# Altium PCB esc.PcbDoc
Units mil, origin at the board's own origin, x right, y up, seen from the top; angles counter-clockwise.
Board outline 1750 x 2825 mil, 4 copper layers (Top Layer, Ground Plane, Power Plane, Bottom Layer), stack 60.4 mil thick; 64 components, 36 nets, 185 pads, 90 vias.
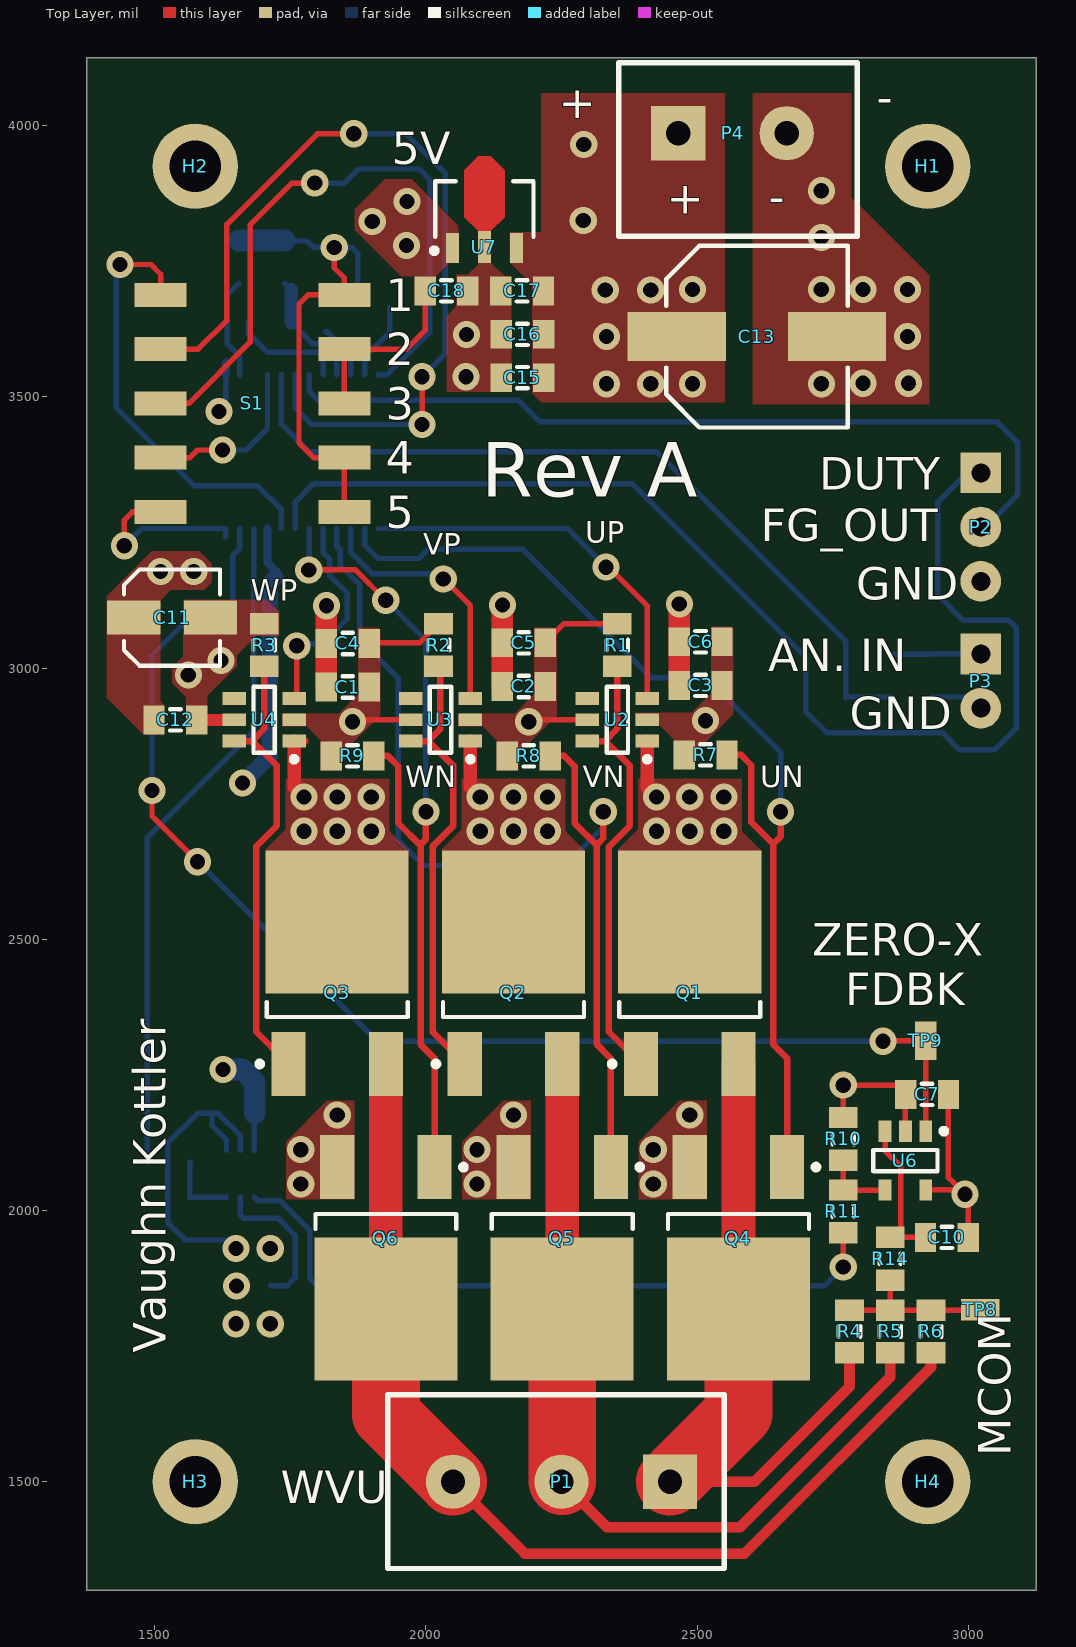
[diagram p0: Top Layer view]
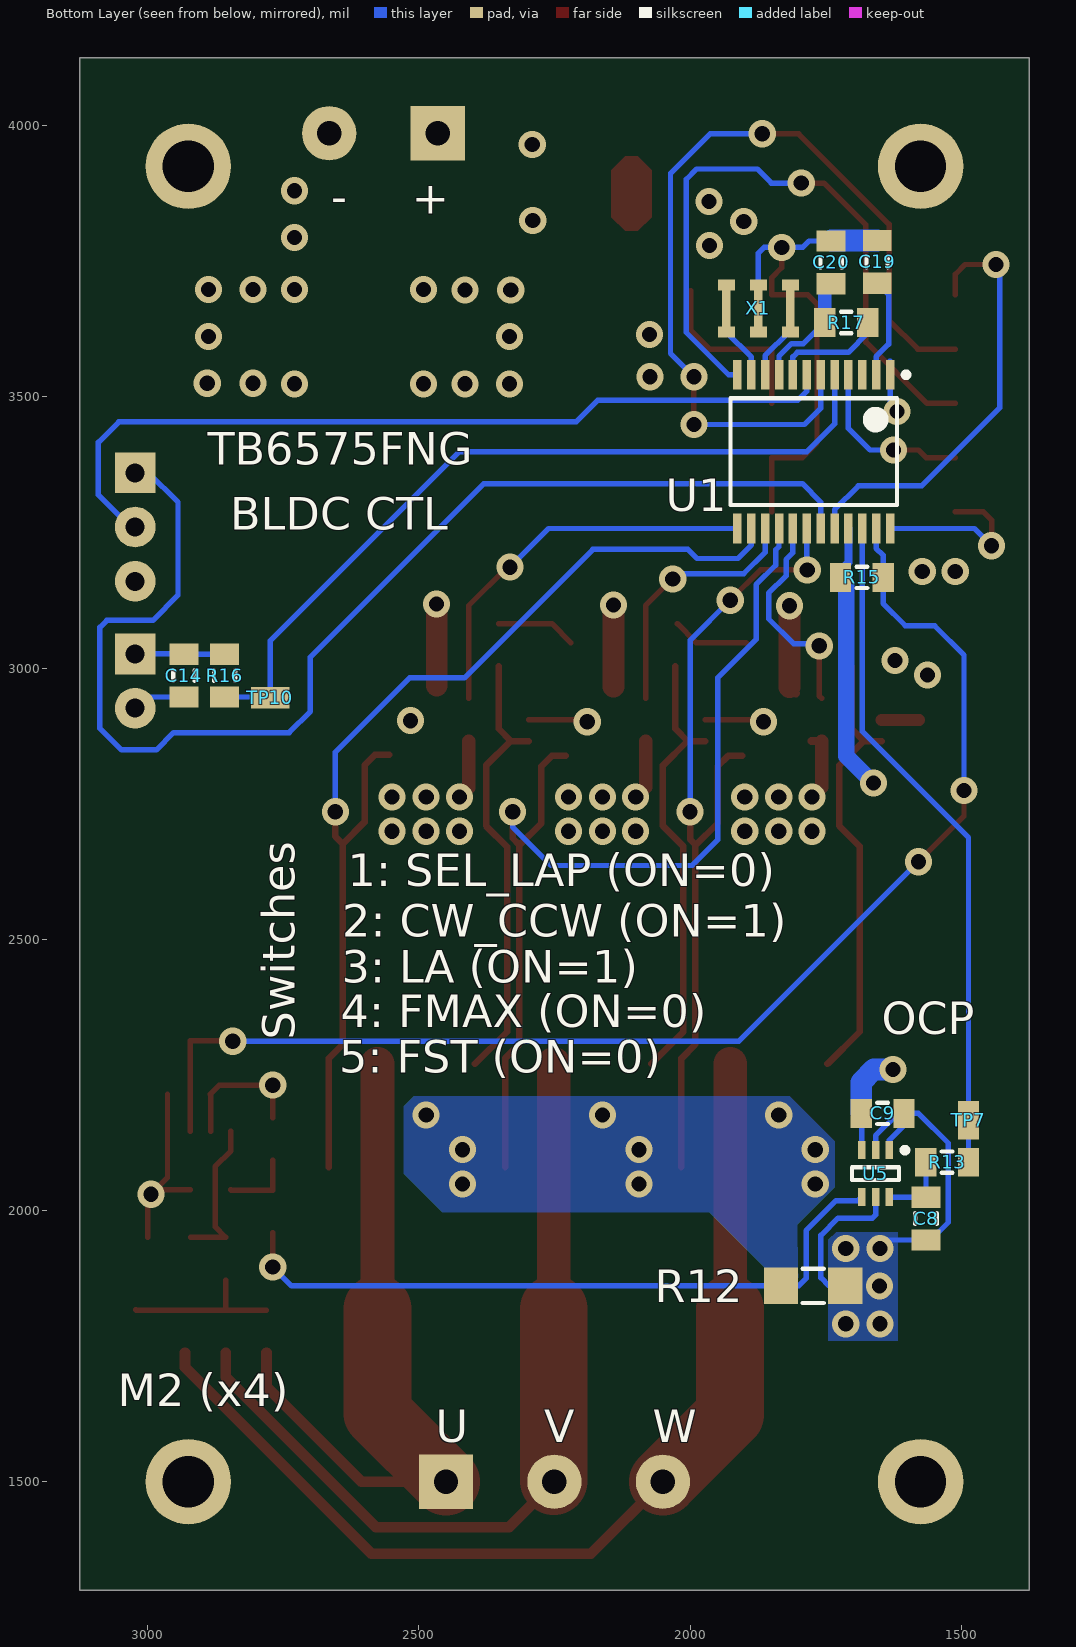
[diagram p1: Bottom Layer view, seen from below]
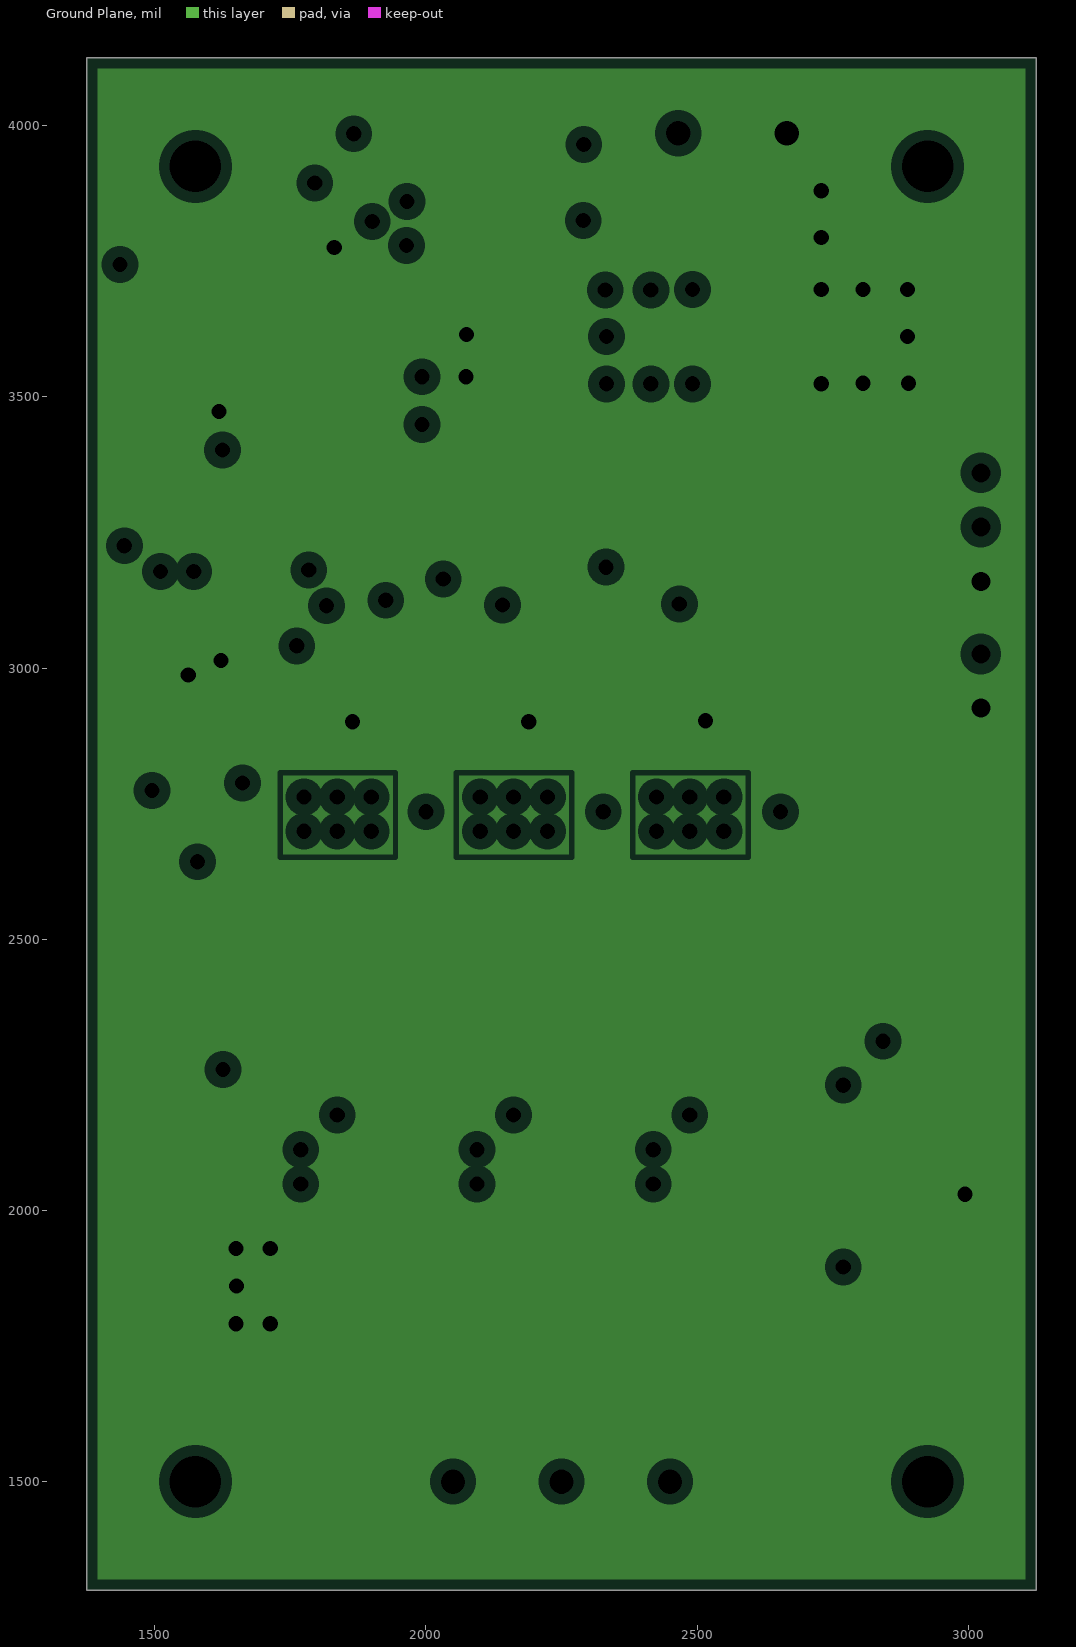
[diagram p2: Ground Plane, clearances drawn from the general rule]
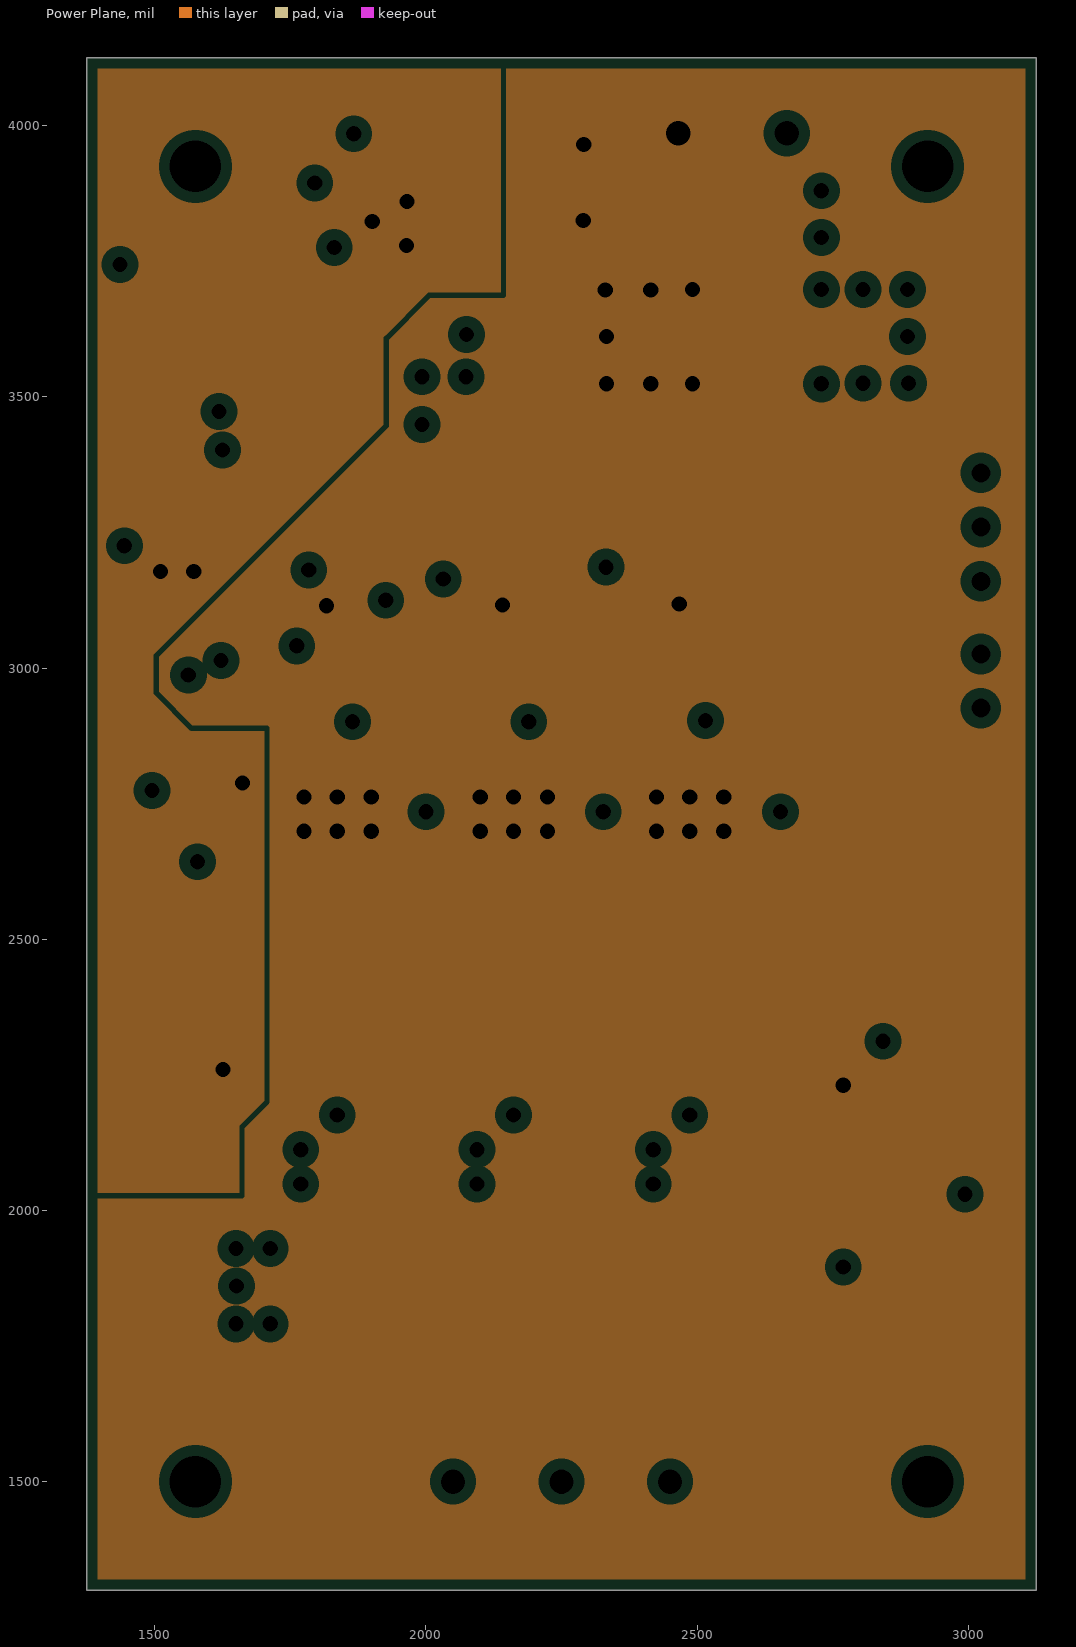
[diagram p3: Power Plane, clearances drawn from the general rule]

## Layer stack, top to bottom
Top Solder: solder mask 0.4, Solder Resist, Dk 3.5
Top Layer: signal copper 1.4
Dielectric 1: prepreg 7.5, Dk 4.3
Ground Plane: plane copper 2.8, net GND
Dielectric 3: core 37, FR-4, Dk 4.3
Power Plane: plane copper 2.8, net VBATT+
Dielectric 4: prepreg 7.5, Dk 4.3
Bottom Layer: signal copper 1.4
Bottom Solder: solder mask 0.4, Solder Resist, Dk 3.5

## Board outline
1375,1300 1375,4125 3125,4125 3125,1300

## Design rules (kind name [scope] priority, off if disabled: settings)
Clearance [All] p1: gap=6 ignorepadtopadclearanceinfootprint=FALSE except(0: Arc-Hole Track-Hole SMDPad-Hole THPad-Hole Via-Hole Fill-Hole Poly-Hole Region-Hole Text-Hole)
MinimumSolderMaskSliver [All] p1: minsoldermaskwidth=1
PlaneClearance [All] p1: clearance=20
PlaneConnect [All] p1: planeconnectstyle=Direct reliefexpansion=20 reliefentries=4 reliefconductorwidth=10 reliefairgap=10
PolygonConnect PolygonConnect_16 [All vs IsNamedPolygon('Top Layer-5V')] p1: connectstyle=Direct reliefconductorwidth=10 reliefentries=4 polygonreliefangle="90 Angle" airgapwidth=10
PolygonConnect PolygonConnect_15 [All vs IsNamedPolygon('5V_L01_P032')] p2: connectstyle=Direct reliefconductorwidth=10 reliefentries=4 polygonreliefangle="90 Angle" airgapwidth=10
PolygonConnect PolygonConnect_14 [All vs IsNamedPolygon('5V_L01_P032')] p3: connectstyle=Direct reliefconductorwidth=10 reliefentries=4 polygonreliefangle="90 Angle" airgapwidth=10
PolygonConnect PolygonConnect_13 [All vs IsNamedPolygon('5V-TOP')] p4: connectstyle=Direct reliefconductorwidth=10 reliefentries=4 polygonreliefangle="90 Angle" airgapwidth=10
PolygonConnect PolygonConnect_12 [All vs IsNamedPolygon('GND_L01_P028')] p5: connectstyle=Direct reliefconductorwidth=10 reliefentries=4 polygonreliefangle="90 Angle" airgapwidth=10
PolygonConnect PolygonConnect_11 [All vs IsNamedPolygon('GND_L01_P026')] p6: connectstyle=Direct reliefconductorwidth=10 reliefentries=4 polygonreliefangle="90 Angle" airgapwidth=10
PolygonConnect PolygonConnect_10 [All vs IsNamedPolygon('GND_L01_P026')] p7: connectstyle=Direct reliefconductorwidth=10 reliefentries=4 polygonreliefangle="90 Angle" airgapwidth=10
PolygonConnect PolygonConnect_9 [All vs IsNamedPolygon('GND_L01_P024')] p8: connectstyle=Direct reliefconductorwidth=10 reliefentries=4 polygonreliefangle="90 Angle" airgapwidth=10
PolygonConnect PolygonConnect_8 [All vs IsNamedPolygon('GND_L01_P022')] p9: connectstyle=Direct reliefconductorwidth=10 reliefentries=4 polygonreliefangle="90 Angle" airgapwidth=10
PolygonConnect PolygonConnect_7 [All vs IsNamedPolygon('GND_L01_P022')] p10: connectstyle=Relief reliefconductorwidth=4 reliefentries=4 polygonreliefangle="90 Angle" airgapwidth=10
PolygonConnect PolygonConnect_6 [All vs IsNamedPolygon('5V-REG-GND')] p11: connectstyle=Direct reliefconductorwidth=10 reliefentries=4 polygonreliefangle="90 Angle" airgapwidth=10
PolygonConnect PolygonConnect_5 [All vs IsNamedPolygon('GND-IN')] p12: connectstyle=Direct reliefconductorwidth=10 reliefentries=4 polygonreliefangle="90 Angle" airgapwidth=10
PolygonConnect PolygonConnect_4 [All vs IsNamedPolygon('VBATT-IN')] p13: connectstyle=Direct reliefconductorwidth=10 reliefentries=4 polygonreliefangle="90 Angle" airgapwidth=10
PolygonConnect PolygonConnect_3 [All vs IsNamedPolygon('RET-GND')] p14: connectstyle=Direct reliefconductorwidth=10 reliefentries=4 polygonreliefangle="90 Angle" airgapwidth=10
PolygonConnect PolygonConnect_2 [All vs InNet('VBATT+')] p15: connectstyle=Direct reliefconductorwidth=10 reliefentries=4 polygonreliefangle="90 Angle" airgapwidth=10
PolygonConnect PolygonConnect_1 [All vs InNet('FET_RET')] p16: connectstyle=Direct reliefconductorwidth=10 reliefentries=4 polygonreliefangle="90 Angle" airgapwidth=10
PolygonConnect [All] p17: connectstyle=Relief reliefconductorwidth=10 reliefentries=4 polygonreliefangle="90 Angle" airgapwidth=10
RoutingVias [All] p1: holewidth=28 width=50 viastyle="Through Hole" minholewidth=28 minwidth=50 maxholewidth=28 maxwidth=50
SilkToSolderMaskClearance [IsPad] p1 off: minsilkscreentomaskgap=10 clearancetoexposedcopper=TRUE
SolderMaskExpansion [All] p1: expansion=4
Width [All] p1: maxlimit=200 minlimit=10 preferedwidth=10
26 further rules are at their usual default settings.

## Classes and differential pairs
polygon class POWER: FET-RET-TOP-1 FET-RET-TOP-3
component class "Output Stage": C1 C2 C3 C4 C5 C6 C7 C8 C9 C10 Q1 Q2 Q3 Q4 Q5 Q6 R1 R2 R3 R4 R5 R6 R7 R8 R9 R10 R11 R12 R13 R14 R15 TP7 TP8 TP9 U2 U3 U4 U5 U6
component class esc: C11 C12 H1 H2 H3 H4 P1 P2 S1 U1 X1
component class "ESC Control Inputs": C13 C14 C15 C16 C17 C18 C19 C20 P3 P4 R16 R17 TP10 U7

## Components (designator, comment, footprint, x,y, rotation, side; value= is the part's Value field where it differs from the comment)
C1 "1 uF" CAP-CER-0805-TALL 1855.93,2965.02 r180 top
C2 "1 uF" CAP-CER-0805-TALL 2180.37,2966 r180 top
C3 "1 uF" CAP-CER-0805-TALL 2506.61,2968 r180 top
C4 "0.1 uF" CAP-CER-0805-SHORT 1855.93,3045.37 r180 top
C5 "0.1 uF" CAP-CER-0805-SHORT 2180.37,3046.56 r180 top
C6 "0.1 uF" CAP-CER-0805-SHORT 2506.61,3048.56 r180 top
C7 "0.1 uF" CAP-CER-0805-SHORT 2924,2214 r180 top
C8 "10 nF" CAP-CER-0805-SHORT 1565,1985 r90 bottom
C9 "0.1 uF" CAP-CER-0805-SHORT 1645,2179 r0 bottom
C10 "22 pF" CAP-CER-0805-SHORT 2960.37,1950.37 r180 top
C11 "22uF" CAP-CAN-5.3x5.3 1532,3093 r0 top
C12 "0.1 uF" CAP-CER-0805-SHORT 1538,2904.5 r180 top
C13 "220 uF" CAP-CAN-8.3x8.3 2610.32,3611 r0 top
C14 "10 nF" CAP-CER-0805-SHORT 2933,2986 r90 bottom
C15 "0.22 uF" CAP-CER-0805-SHORT 2178,3535.32 r0 top
C16 "0.1 uF" CAP-CER-0805-SHORT 2178,3615.32 r0 top
C17 "10 nF" CAP-CER-0805-SHORT 2177.37,3695.32 r0 top
C18 "0.1 uF" CAP-CER-0805-SHORT 2038,3695.32 r180 top
C19 "0.47 uF" CAP-CER-0805-TALL 1655,3748.81 r270 bottom
C20 "1 uF" CAP-CER-0805-TALL 1740,3748 r270 bottom
H1 "Mount Hole" "m2 Mount Hole" 2925,3925 r0 top
H2 "Mount Hole" "m2 Mount Hole" 1575,3925 r0 top
H3 "Mount Hole" "m2 Mount Hole" 1575,1500 r0 top
H4 "Mount Hole" "m2 Mount Hole" 2925,1500 r0 top
P1 "3Pos Screw Terminal" "3POS SCREW TERMINAL" 2450,1500 r270 top
P2 "3Pos Pin Header" "3Pos Pin Header F RA R" 3023,3360 r0 top
P3 "2Pos Pin Header" "2Pos Pin Header F RA R" 3023,3026 r0 top
P4 "2Pos Screw Terminal" "2POS SCREW TERMINAL" 2465.32,3986 r90 top
Q1 "P-Channel" DPAK 2486.47,2400.08 r90 top
Q2 "P-Channel" DPAK 2161.47,2400.08 r90 top
Q3 "P-Channel" DPAK 1836.47,2400.08 r90 top
Q4 "N-Channel" DPAK 2576.24,1950.08 r270 top
Q5 "N-Channel" DPAK 2251.24,1950.08 r270 top
Q6 "N-Channel" DPAK 1926.24,1950.08 r270 top
R1 "1K" RES-0805 2352.88,3042.37 r270 top
R2 "1K" RES-0805 2023.48,3042.37 r270 top
R3 "1K" RES-0805 1701.88,3042.37 r270 top
R4 "10K" RES-0805 2781,1777 r270 top
R5 "10K" RES-0805 2856,1777 r270 top
R6 "10K" RES-0805 2931,1777 r270 top
R7 "1K" RES-0805 2515.63,2840 r0 top
R8 "1K" RES-0805 2189.63,2838 r0 top
R9 "1K" RES-0805 1864.63,2838 r0 top
R10 "100K" RES-0805 2769.4,2131.93 r270 top
R11 "100K" RES-0805 2769.4,1998.24 r270 top
R12 "1m" RES-1206 1773,1861 r180 bottom
R13 "33" RES-0805 1526,2089 r180 bottom
R14 "1K" RES-0805 2856,1911 r270 top
R15 "10K" RES-0805 1683.37,3167.21 r0 bottom
R16 "33" RES-0805 2858,2986 r270 bottom
R17 "220K" RES-0805 1712,3637 r180 bottom
S1 "5Pos DIP Switch" DIP-SW-5 1849.58,3288 r180 top
TP7 "Test Point" "0603 Test Point" 1486.63,2166 r90 bottom
TP8 "Test Point" "0603 Test Point" 3022,1817 r180 top
TP9 "Test Point" "0603 Test Point" 2921.4,2313 r270 top
TP10 "Test Point" "0603 Test Point" 2774,2945 r180 bottom
U1 "TB6575FNG" SSOP24-0.65 1772,3399 r270 bottom
U2 "MOSFET Driver" SOT-23-6 2352.88,2904.63 r180 top
U3 "MOSFET Driver" SOT-23-6 2026.88,2904.63 r180 top
U4 "MOSFET Driver" SOT-23-6 1701.88,2904.63 r180 top
U5 "INA199A2" SC70 1658,2068 r270 bottom
U6 "Comparator, Open-Drain" SOT-23-5 2884,2092 r270 top
U7 "Linear 5V 100mA" SOT-89 2108,3845.32 r90 top
X1 "4.19 MHz, 15 pF" CSTCR 1874,3663 r0 bottom

## Footprints (in the part's own frame and the unit in brackets; to place one, negate y for a bottom-side part, rotate by r counter-clockwise, add the part's x,y. Pads: shape width x height; smd on the part's side, far side on the other; paste and mask are expansions set on the pad)
"2Pos Pin Header F RA R" [mil] "Female, 0.1\" Pitch"
  rect 75x75 hole 35: 1(0,0)
  round 75 hole 35: 2(0,-100)
  body extent -13,-150 395,50, height 100
"2POS SCREW TERMINAL" [mil] "0.2\" Pitch"
  rect 100x100 hole 45: 1(0,0)
  round 100 hole 45: 2(0,-200)
  silkscreen extent -190,-330 130,110, body extent -179,-319 120,99, height 394
"3Pos Pin Header F RA R" [mil] "Female, 0.1\" Pitch"
  rect 75x75 hole 35: 1(0,0)
  round 75 hole 35: 2(0,-100) 3(0,-200)
  body extent -13,-250 395,50, height 100
"3POS SCREW TERMINAL" [mil] "0.2\" Pitch"
  rect 100x100 hole 45: 1(0,0)
  round 100 hole 45: 2(0,-200) 3(0,-400)
  silkscreen extent -160,-520 160,100, body extent -154,-515 155,96, height 411
"0603 Test Point" [mm]
  rect 1.8x1 smd: 1(0,0)
  body extent -0.8,-0.45 0.8,0.45, height 1.16
CAP-CAN-5.3x5.3 [mm] "Aluminum Electrolytic Capacitor, Body 4.30x4.30x5.50mm, IPC Low Density"
  rect 2.5x1.6 smd: 1(-1.8,0) 2(1.8,0)
  silkscreen extent -2.25,-2.25 2.25,2.25, body extent -2.47,-2.25 2.47,2.25, height 5.5
CAP-CAN-8.3x8.3 [mm] "Aluminum Electrolytic Capacitor, Body 8.30x8.30x10.50mm, IPC Low Density"
  rect 4.6x2.3 smd: 1(-3.75,0) 2(3.75,0)
  silkscreen extent -4.25,-4.25 4.25,4.25, body extent -4.95,-4.25 4.95,4.25, height 10.5
CAP-CER-0805-SHORT [mm] "Chip Capacitor, 2-Leads, Body 2.00x1.25mm, IPC Medium Density"
  rect 1x1.35 smd: 1(-1,0) 2(1,0)
  silkscreen extent -0.25,-0.5 0.25,0.5, body extent -1.1,-0.72 1.1,0.72, height 0.9
CAP-CER-0805-TALL [mm] "Chip Capacitor, 2-Leads, Body 2.00x1.25mm, IPC Medium Density"
  rect 1x1.35 smd: 1(-1,0) 2(1,0)
  silkscreen extent -0.25,-0.5 0.25,0.5, body extent -1.1,-0.72 1.1,0.72, height 1.1
CSTCR [mm] "Ceramic Oscillator Built-In Capacitance"
  rect 0.8x0.5 smd: 1(1.5,-1.1) 1(1.5,1.1) 2(0,1.1) 2(0,-1.1) 3(-1.5,-1.1) 3(-1.5,1.1)
  rect 0.4x2.6 smd: 1(1.5,0) 2(0,0) 3(-1.5,0)
  body extent -2.25,-1 2.25,1, height 1.15
DIP-SW-5 [mm] "5 0.1\" Pitch SMT Dip Switches"
  rect 2.44x1.13 smd: 1(0,0) 2(0,-2.54) 3(0,-5.08) 4(0,-7.62) 5(0,-10.16) 6(8.6,-10.16) 7(8.6,-7.62) 8(8.6,-5.08) 9(8.6,-2.54) 10(8.6,0)
  body extent -0.64,-12.16 9.27,2.01, height 4.28
DPAK [mm] "D-PAK, 3-Pads, Body 6.20x6.66mm (max), IPC Medium Density"
  rect 3x1.6 smd: 1(-3.3,2.28) 3(-3.3,-2.28)
  rect 6.7x6.7 smd: 2(3.35,0)
  silkscreen extent -3.42,-3.3 -0.4,3.75, body extent -3.81,-3.3 5.91,3.3, height 2.63
"m2 Mount Hole" [mm] "4mm"
  round 4 hole 2.4: H(0,0)
  body extent -1.9,-1.9 1.9,1.9, height 2
RES-0805 [mm] "Chip Resistor, 2-Leads, Body 2.00x1.25mm, IPC Medium Density"
  rect 1x1.35 smd: 1(-1,0) 2(1,0)
  silkscreen extent -0.25,-0.5 0.25,0.5, body extent -1.07,-0.7 1.07,0.7, height 0.65
RES-1206 [mm] "Chip Resistor, 2-Leads, Body 3.20x1.60mm, IPC Medium Density"
  rect 1.6x1.7 smd: 1(-1.5,0) 2(1.5,0)
  silkscreen extent -0.5,-0.8 0.5,0.8, body extent -1.72,-0.85 1.73,0.85, height 0.8
SC70 [mm] "SOT23, 6-Leads, Body 2.00x2.10mm, Pitch 0.65mm, IPC Medium Density"
  rect 0.85x0.35 smd: 1(-1.1,0.65) 2(-1.1,0) 3(-1.1,-0.65) 4(1.1,-0.65) 5(1.1,0) 6(1.1,0.65)
  silkscreen extent -1.22,-1.1 0.3,1.5, body extent -1.2,-1.08 1.2,1.07, height 1.1
SOT-23-5 [mm] "SOT23, 5-Leads, Body 2.90x2.80mm, Pitch 0.95mm, IPC Medium Density"
  rect 1x0.6 smd: 1(-1.375,0.95) 2(-1.375,0) 3(-1.375,-0.95) 4(1.375,-0.95) 5(1.375,0.95)
  silkscreen extent -1.5,-1.5 0.5,1.93, body extent -1.6,-1.5 1.6,1.5, height 1.45
SOT-23-6 [mm] "SOT23, 6-Leads, Body 2.90x2.70mm, Pitch 1.00mm, IPC Medium Density"
  rect 1.1x0.6 smd: 1(-1.4,1) 2(-1.4,0) 3(-1.4,-1) 4(1.4,-1) 5(1.4,0) 6(1.4,1)
  silkscreen extent -1.53,-1.55 0.5,1.97, body extent -1.7,-1.55 1.7,1.55, height 1.45
SOT-89 [mm] "SOT89, 3-Leads, Body 4.50x2.45mm, Pitch 1.50mm, Lead Span 4.1mm, IPC Medium Density"
  rect 1.4x0.6 smd: 1(-1.8,1.5) 3(-1.8,-1.5)
  rect 1.5x0.6 smd: 2(-1.75,0)
  Top Layer region: -1,0.3 -0.35,0.95 1.85,0.95 2.5,0.3 2.5,-0.3 1.85,-0.95 -0.35,-0.95 -1,-0.3
  silkscreen extent -2.05,-2.3 1.32,2.47, body extent -2.2,-2.3 2.1,2.3, height 1.6
SSOP24-0.65 [mm] "TSOP, 24-Leads, Body 7.70x5.60mm, Pitch 0.65mm, IPC Medium Density"
  rect 1.4x0.4 smd: 1(-3.6,3.575) 2(-3.6,2.925) 3(-3.6,2.275) 4(-3.6,1.625) 5(-3.6,0.975) 6(-3.6,0.325) 7(-3.6,-0.325) 8(-3.6,-0.975) 9(-3.6,-1.625) 10(-3.6,-2.275) 11(-3.6,-2.925) 12(-3.6,-3.575) 13(3.6,-3.575) 14(3.6,-2.925) 15(3.6,-2.275) 16(3.6,-1.625) 17(3.6,-0.975) 18(3.6,-0.325) 19(3.6,0.325) 20(3.6,0.975) 21(3.6,1.625) 22(3.6,2.275) 23(3.6,2.925) 24(3.6,3.575)
  silkscreen extent -3.72,-3.9 2.5,4.45, body extent -3.8,-3.9 3.8,3.9, height 1.6

## Part data
C1 C2 C3: library part CAP-CER-1uF-10V, "10%, 0805", ComponentLink1Description="Capacitor Book (Amazon)", ComponentLink1URL=https://www.amazon.com/gp/product/B0728HBDRW/
C4 C5 C6 C7 C9 C12 C16 C18: library part CAP-CER-0.1uF-25V, "10%, 0805", ComponentLink1Description="Capacitor Book (Amazon)", ComponentLink1URL=https://www.amazon.com/gp/product/B0728HBDRW/
C8 C14: library part CAP-CER-10nF-50V, "10%, 0805", ComponentLink1Description="Capacitor Book (Amazon)", ComponentLink1URL=https://www.amazon.com/gp/product/B0728HBDRW/
C10: library part CAP-CER-22pF-50V, "±5%, 0805", ComponentLink1Description="Capacitor Book (Amazon)", ComponentLink1URL=https://www.amazon.com/gp/product/B0728HBDRW/
C11: library part CAP-CAN-22uF-35V, "±20%, 5.3mm x 5.3mm", Supplier Part Number 1=PCE3838DKR-ND, Supplier 1=Digi-Key
C13: library part CAP-CAN-220uF-35V, "±20%, 8.3mm x 8.3mm", Supplier Part Number 1=PCE3955DKR-ND, Supplier 1=Digi-Key
C15: library part CAP-CER-0.22uF-50V, "10%, 0805", ComponentLink1Description="Capacitor Book (Amazon)", ComponentLink1URL=https://www.amazon.com/gp/product/B0728HBDRW/
C17: library part CAP-CER-10nF-50V, "±10%, 0805", ComponentLink1Description="Capacitor Book (Amazon)", ComponentLink1URL=https://www.amazon.com/gp/product/B0728HBDRW/
C19: library part CAP-CER-0.47uF-50V, "±10%, 0805", ComponentLink1Description="Capacitor Book (Amazon)", ComponentLink1URL=https://www.amazon.com/gp/product/B0728HBDRW/
C20: library part CAP-CER-1uF-10V, "±10%, 0805", ComponentLink1Description="Capacitor Book (Amazon)", ComponentLink1URL=https://www.amazon.com/gp/product/B0728HBDRW/
P1: "0.2\" Pitch 1x3"
P2: "0.1\" Pitch 1x3"
P3: "0.1\" Pitch 1x2"
P4: "0.2\" Pitch 1x2"
Q1 Q2 Q3: library part PMOS-1.9VT-40VDS-40A, "P-Channel MOSFET", Supplier Part Number 1=785-1351-6-ND, ComponentLink1Description=Datasheet, ComponentLink1URL=http://aosmd.com/res/data_sheets/AOD4189.pdf, Supplier 1=Digi-Key
Q4 Q5 Q6: library part NMOS-2.5VT-60VDS-35A, "N-Channel MOSFET", Supplier Part Number 1=497-7965-6-ND, ComponentLink1Description=Datasheet, ComponentLink1URL=https://www.st.com/content/ccc/resource/technical/document/datasheet/48/eb/5d/41/e2/c9/48/f2/CD00002363.pdf/files/CD00002363.pdf/jcr:content/translations/en.CD00002363.pdf, Supplier 1=Digi-Key
R1 R2 R3 R7 R8 R9 R14: library part RES-1K-1/8W, "0805", ComponentLink1Description="Resistor Book (Amazon)", ComponentLink1URL=https://www.amazon.com/gp/product/B071J21FYF/
R4 R5 R6 R15: library part RES-10K-1/8W, "0805", ComponentLink1Description="Resistor Book (Amazon)", ComponentLink1URL=https://www.amazon.com/gp/product/B071J21FYF/
R10 R11: library part RES-100K-1/8W, "0805", ComponentLink1Description="Resistor Book (Amazon)", ComponentLink1URL=https://www.amazon.com/gp/product/B071J21FYF/
R12: library part RES-1m-1W, "0805", Supplier Part Number 1=696-1369-6-ND, Supplier 1=Digi-Key
R13 R16: library part RES-33-1/8W, "0805", ComponentLink1Description="Resistor Book (Amazon)", ComponentLink1URL=https://www.amazon.com/gp/product/B071J21FYF/
R17: library part RES-220K-1/8W, "0805", ComponentLink1Description="Resistor Book (Amazon)", ComponentLink1URL=https://www.amazon.com/gp/product/B071J21FYF/
S1: "5 Position 0.1\" SMT Dip Switch", Supplier Part Number 1=CT2195LPST-ND, Supplier 1=Digi-Key
TP7 TP8 TP9 TP10: "0603", Supplier Part Number 1=A106145DKR-ND, Supplier 1=Digi-Key
U1: "Sensorless 3-Phase BLDC Controller", Supplier Part Number 1=TB6575FNGC8ELDKR-ND, ComponentLink1Description=Datasheet, ComponentLink1URL=toshiba.semicon-storage.com/info/docget.jsp?did=2162&prodName=TB6575FNG, Supplier 1=Digi-Key
U2 U3 U4: library part MCP14A0052, "0.5A MOSFET Driver", Supplier Part Number 1=MCP14A0052T-E/CHDKR-ND, ComponentLink1Description=Datasheet, ComponentLink1URL=http://ww1.microchip.com/downloads/en/DeviceDoc/20005369A.pdf, Supplier 1=Digi-Key
U5: "50 V/V, Current-Shunt Monitor", Supplier Part Number 1=296-27329-6-ND, ComponentLink1Description=Datasheet, ComponentLink1URL=http://www.ti.com/lit/ds/symlink/ina199.pdf, Supplier 1=Digi-Key
U6: library part LMC7221, Supplier Part Number 1=LMC7221BIM5X/NOPBDKR-ND, ComponentLink1Description=Datasheet, ComponentLink1URL=http://www.ti.com/lit/ds/symlink/lmc7221.pdf, Supplier 1=Digi-Key
U7: library part L78L05ACUTR, "Linear Regulator, 5V, 100mA", Supplier Part Number 1=497-1183-6-ND, ComponentLink1Description=Datasheet, ComponentLink1URL=https://www.st.com/content/ccc/resource/technical/document/datasheet/15/55/e5/aa/23/5b/43/fd/CD00000446.pdf/files/CD00000446.pdf/jcr:content/translations/en.CD00000446.pdf, Supplier 1=Digi-Key
X1: library part XTAL-4.19MHz-15pF, "Ceramic, 3-SMD, Built-In Capacitance", Supplier Part Number 1=490-1201-6-ND, ComponentLink1Description="Part Numbering", ComponentLink1URL=https://www.murata.com/en-us/products/productdata/8796821913630/L0430E.pdf, ComponentLink2Description="Application Note", ComponentLink2URL=https://www.murata.com/~/media/webrenewal/support/library/catalog/products/timingdevice/ceralock/p17e.ashx, ComponentLink3Description=Datasheet, ComponentLink3URL=https://www.murata.com/~/media/webrenewal/support/library/catalog/products/timingdevice/ceralock/p16e.ashx, Supplier 1=Digi-Key

## Via types
v1: diameter 50, hole 28, Top Layer to Bottom Layer, tented both sides, 84 vias
v2: diameter 50, hole 28, Top Layer to Bottom Layer, 6 vias

## Nets (pads, with @x,y where several pads share a name; then routed paths per layer and width w, separated by ;. In a path a pad name is that pad's centre, name@x,y a point inside that pad or via, vN(x,y) a via of type N, cw(c..) or ccw(c..) an arc to the next point about the centre after c; other vN are vias at no path point)
5V: C9.2 C11.1 C12.2 C18.2 R15.2 S1.3 S1.4 U1.21 U5.3 U7.1 | length 1019.7
  Top Layer w10: S1.3 S1.4 1964,3588 1998.63,3622.63 C18.2
  Bottom Layer w10: U5.3 1683.59,2178.22 C9.2
  Bottom Layer w15: U1.21 1708.02,3194.35 R15.2@1724,3178.37
  Bottom Layer w30: v1(1662,2788) 1712,2838 1712,3156.47 R15.2
  Bottom Layer w40: v1(1626,2260) 1661,2260 1684.37,2236.63 C9.2
  other v1: 1511,3178 1572,3178 1964,3779 1901,3823 1965,3860
FET_RET: Q4.3 Q5.3 Q6.3 R11.2 R12.1 U5.4 | length 1282.5
  Top Layer w10: v1(2769.4,1896) R11.2
  Bottom Layer w10: U5.4 1690.28,2018 1730.88,2018 1786,1962.88 1786,1875 1800,1861 R12.1 2734.4,1861 v1(2769.4,1896)
  other v1: 1769.24,2049.08 2094.24,2049.08 2419.24,2049.08 1769.24,2112.08 2094.24,2112.08 2419.24,2112.08 1836.47,2176.08 2161.47,2176.08 2486.47,2176.08
GND: C1.1 C2.1 C3.1 C4.1 C5.1 C6.1 C7.1 C8.1 C9.1 C10.1 C11.2 C12.1 C13.2 C14.1 C15.1 C16.1 C17.1 C18.1 C19.1 C20.1 P2.3 P3.2 P4.2 R1.1 R2.1 R3.1 R7.1 R8.1 R9.1 R12.2 S1.1 S1.2 S1.5 U1.1 U2.2 U2.5 U3.2 U3.5 U4.2 U4.5 U5.1 U5.2 U5.5 U6.5 U7.2 X1.2 | length 2900.6
  Top Layer w10: C12.1 C12.1@1577.5,2904.63 ; v1(1831,3775.5) 1831,3738 1849.58,3719.42 S1.5 1783,3688 1766,3671 1766,3415 1793,3388 S1.2 S1.1 ; v1(1864.63,2901) 1868.26,2904.63 U3.5 ; C4.1 1896.93,3047 1988.74,3047 R2.1 ; v1(2189.63,2901) 2193.26,2904.63 U2.5 ; C5.1 2254.92,3081.74 R1.1 ; U6.5 v1@2986.13,2037.87 ; C7.1 2963.37,2060.63 v1@2986.13,2037.87 ; C10.1 2999.74,2024.26 v1(2994,2030) v1@2986.13,2037.87
  Top Layer w22: C12.1@1577.5,2904.63 U4.5
  Bottom Layer w10: v1(1618.46,3473) 1631.25,3485.8 U1.1 ; U5.1 1632.41,2129.59 1605.63,2156.37 C9.1 ; v1@1658,1937.94 v1(1650.06,1930) 1634.43,1945.63 C8.1 1556.37,1945.63 1524,1978 1524,2124 1579,2179 C9.1 ; U5.5 1658,1992 1664,1986 1727,1986 1759,1954 1759,1876.12 1743.88,1861 R12.2 ; U5.2 1658,2138 1617,2179 C9.1 ; C20.1@1739.19,3788.18 C20.1 1780.63,3787.37 1792.5,3775.5 v1(1831,3775.5) 1863.5,3775.5 1874.01,3764.99 X1.2@1874.01,3706.31 ; C14.1 3002.37,2946.63 P3.2
  Bottom Layer w15: U1.1 U1.1@1631.25,3562.75
  Bottom Layer w40: C19.1 C20.1@1739.19,3788.18
  other v1: 1650,1791 1712.94,1791 1651,1861 1713,1930 2515.63,2903 1562,2987 1622,3014 2729,3524 2806,3525 2890,3525 2074,3537 2887.88,3611 2075,3615 2729,3698 2806,3698 2887.88,3698 2729,3794 2729,3880
IP: C20.2 R17.1 U1.9 | length 220.9
  Bottom Layer w10: C20.2 C20.2@1751.37,3697.26 ; R17.1 1751.8,3637 1790.8,3598 1813,3598 1835.98,3575.02 U1.9
  Bottom Layer w25: R17.1 C20.2@1751.37,3697.26
Motor_Com: R4.1 R5.1 R6.1 R14.2 TP8.1 | length 296.5
  Top Layer w10: R4.1 R5.1 ; R14.2 R5.1 ; TP8.1 3021.37,1816.37 R6.1 R5.1
Motor_U: P1.1 Q1.3 Q4.2 R4.2 | length 1288.6
  Top Layer w20: P1.1 2606,1500 2781,1675 R4.2
  Top Layer w62: Q4.2 Q1.3
  Top Layer w125: P1.1 2576.24,1626.24 Q4.2
Motor_V: P1.2 Q2.3 Q5.2 R5.2 | length 1570.8
  Top Layer w10: P1.2 P1.2@2251.24,1501.24
  Top Layer w20: P1.2 2334,1416 2579,1416 2856,1693 R5.2
  Top Layer w62: Q5.2 Q2.3
  Top Layer w125: P1.2@2251.24,1501.24 Q5.2
Motor_W: P1.3 Q3.3 Q6.2 R6.2 | length 1926.6
  Top Layer w20: P1.3 2183,1367 2587,1367 2931,1711 R6.2
  Top Layer w62: Q6.2 Q3.3
  Top Layer w125: Q6.2 1926.24,1623.76 P1.3
NetC8_2: C8.2 R13.1 U5.6 | length 132.3
  Bottom Layer w10: R13.1 1565,2088.63 C8.2 1565.32,2024.69 U5.6
NetC10_2: C10.2 R14.1 U6.3 | length 281
  Top Layer w10: U6.3 2846.6,2109.72 2875.68,2080.63 2875.68,1970.06 R14.1 C10.2
NetC14_2: C14.2 P3.1 R16.1 | length 165.3
  Bottom Layer w10: R16.1 C14.2 2933.63,3026 P3.1
NetP2_1: P2.1 U1.19 | length 2297.9
  Bottom Layer w10: U1.19 1759.2,3306.2 1793,3340 2380,3340 2700,3020 2700,2920 2739,2881 2952,2881 2984,2849 3048,2849 3088,2889 3088,3075 3075,3088 2990.3,3088 2944,3134.3 2944,3306 2998,3360 P2.1
NetP2_2: P2.2 U1.7 | length 1564.9
  Bottom Layer w10: U1.7 1784.8,3510.63 1801.43,3494 2170,3494 2210,3454 3053,3454 3091,3416 3091,3319 3032,3260 P2.2
NetQ1_1: Q1.1 R1.2 U2.6 | length 833.9
  Top Layer w12: U2.6 2330.26,2865.26 2352.88,2887.88 R1.2 ; 2331.23,2865.26 2376,2820.49 2376,2709 2337.24,2670.24 2337.24,2329.63 Q1.1
NetQ2_1: Q2.1 R2.2 U3.6 | length 834.5
  Top Layer w12: U3.6 2004.26,2865.26 ; R2.2@2026.88,3003 2026.88,2887.88 2004.26,2865.26 ; Q2.1 2012.24,2329.63 2012.24,2671.24 2050,2709 2050,2820.49 2005.23,2865.26 2004.26,2865.26
NetQ3_1: Q3.1 R3.2 U4.6 | length 833.5
  Top Layer w12: U4.6 1679.26,2865.26 1701.88,2887.88 R3.2 ; 1680.23,2865.26 1725,2820.49 1725,2709 1687.24,2671.24 1687.24,2329.63 Q3.1
NetR10_2: R10.2 R11.1 U6.4 | length 132.2
  Top Layer w10: R10.2 R11.1 2846.35,2037.61 U6.4
NetR16_2: R16.2 TP10.1 U1.5 | length 1486.5
  Bottom Layer w10: U1.5 1733.61,3449.98 1784.59,3399 1993,3399 2425,3399 2774,3050 TP10.1 2775.63,2946.63 R16.2
NetS1_6: S1.6 U1.20 | length 804.6
  Top Layer w10: v1(1436,3744) 1493,3744 1511,3726 S1.6
  Bottom Layer w10: v1(1436,3744) 1429,3737 1429,3480 1573,3336 1689.57,3336 1733.61,3291.96 U1.20
NetS1_7: S1.7 U1.6 | length 1612.2
  Top Layer w10: S1.7 1580,3588 1633,3641 1633,3818 1800,3985 v1(1867,3985) ; v1(1993,3449) v1(1993,3537)
  Bottom Layer w10: U1.6 1759.2,3478.8 1789,3449 v1(1993,3449) ; v1(1867,3985) 1963,3985 2036,3912 2036,3580 v1(1993,3537)
NetS1_8: S1.8 U1.12 | length 1218
  Top Layer w10: S1.8 1563,3488 1676,3601 1676,3817 1753,3894 v1(1795,3894)
  Bottom Layer w10: v1(1795,3894) 1850,3894 1876,3920 1988,3920 2007,3901 2007,3619 1928.73,3540.73 U1.12
NetS1_9: S1.9 U1.4 | length 318.1
  Top Layer w10: S1.9 1565,3388 1579,3402 v1(1625,3402)
  Bottom Layer w10: v1(1625,3402) 1668,3402 1708.02,3442.02 U1.4
NetS1_10: S1.10 U1.24 | length 347.4
  Top Layer w10: v1(1444,3225.54) 1444,3273 1459,3288 S1.10
  Bottom Layer w10: v1@1436,3233.54 v1(1444,3225.54) 1475.73,3257.27 U1.24 U1.24@1631.25,3242.25
NetU1_10: U1.10 X1.3 | length 100
  Bottom Layer w10: X1.3@1814.94,3619.69 1817.89,3619.69 1861.57,3576.02 U1.10
NetU1_11: U1.11 X1.1 | length 141.3
  Bottom Layer w10: U1.11 1887.16,3573.16 1933.06,3619.06 X1.1@1933.06,3663
OC: R13.2 TP7.1 U1.22 | length 1249.4
  Bottom Layer w10: R13.2 TP7.1 1486.63,2687.63 1682.43,2883.43 U1.22
SC: C19.2 U1.2 | length 186.9
  Bottom Layer w10: C19.2 1634,3688.44 1634,3597 1656.84,3574.16 U1.2
START: R17.2 U1.8 | length 208.4
  Bottom Layer w10: R17.2 1672.63,3617.37 1708,3582 1802,3582 1810.39,3573.61 U1.8
UN: Q4.1 R7.2 U1.14 | length 1965.7
  Top Layer w12: R7.2 2581,2840 2600,2821 2600,2716 2640.24,2675.76 ; v2(2654,2735) 2654,2689.53 2640.24,2675.76 ; Q4.1 2666,2280.32 2640.24,2306.08 2640.24,2675.76
  Bottom Layer w10: U1.14 1887.16,3226.84 1912,3202 1987,3202 2004,3219 2179,3219 2416,2982 2517,2982 2654,2845 v2(2654,2735)
UP: U1.13 U2.3 | length 725.2
  Top Layer w10: v2(2332,3186) 2337,3186 2408,3115 U2.3
  Bottom Layer w10: U1.13 2260.73,3257.27 v2(2332,3186)
VBATT+: C1.2 C2.2 C3.2 C4.2 C5.2 C6.2 C7.2 C13.1 C15.2 C16.2 C17.2 P4.1 Q1.2 Q2.2 Q3.2 R10.1 U2.1 U3.1 U4.1 U6.2 U7.3 | length 1066.9
  Top Layer w10: 1757,2780.32 v1(1775.24,2762.08) ; 2082,2780.32 v1(2100.24,2762.08) ; v1@2408,2779.32 v1(2425.24,2762.08) ; R10.1 v1(2769.4,2231) 2867.63,2231 C7.2 2884,2213.37 U6.2
  Top Layer w15: U4.1 U4.1@1776.26,2865.26 ; C1.2@1805,2953.46 C1.2
  Top Layer w25: 1757,2780.32 U4.1 ; 2082,2780.32 U3.1 ; v1@2408,2779.32 U2.1
  Top Layer w40: C1.2 C4.2 v1(1816.56,3114.81) ; C2.2 v1@2141,3115.79 ; C3.2 v1@2467.24,3117.79
  other v1: 1775.24,2699.08 1836.47,2699.08 1899.24,2699.08 2100.24,2699.08 2161.47,2699.08 2224.24,2699.08 2425.24,2699.08 2486.47,2699.08 2549.24,2699.08 1836.47,2762.08 1899.24,2762.08 2161.47,2762.08 2224.24,2762.08 2486.47,2762.08 2549.24,2762.08 2141,3116 2467.24,3118 2332.76,3524 2414.65,3524 2491.65,3524 2332.76,3611 2330.65,3697 2414.65,3697 2491.65,3698 2290,3825 2291,3965
VN: Q5.1 R8.2 U1.16 | length 1962.7
  Top Layer w12: R8.2 2255,2838 2274,2819 2274,2714 2315.24,2672.76 ; v2(2327,2735) 2327,2686.46 2315.24,2674.69 2315.24,2672.76 ; Q5.1 2341,2280.32 2315.24,2306.08 2315.24,2672.76
  Bottom Layer w10: U1.16 1835.98,3223.98 1842,3217.95 1842,3189.84 1878,3153.84 1878,3053 1949,2982 1949,2683 1996,2636 2256,2636 2327,2707 v2(2327,2735)
VP: U1.15 U3.3 | length 476
  Top Layer w10: v2(2032,3164) 2033,3164 2082,3115 U3.3
  Bottom Layer w10: U1.15 1861.57,3213.43 1901,3174 2022,3174 v2(2032,3164)
WAVE: R15.1 TP9.1 U1.23 U6.1 | length 2394.5
  Top Layer w10: v1(1495,2774) 1495,2727 v1(1579,2643) ; v1(2843,2312) 2844,2313 TP9.1 U6.1
  Bottom Layer w10: v1(1495,2774) 1495,3024 1549,3078 1603,3078 1644,3119 R15.1 1644,3208 1656.84,3220.84 U1.23 ; v1(1579,2643) 1910,2312 v1(2843,2312)
WN: Q6.1 R9.2 U1.18 | length 1548.3
  Top Layer w10: v1(1784,3181) 1870,3181 v1(1926,3125)
  Top Layer w12: R9.2 1930,2838 1949,2819 1949,2714 1990.24,2672.76 ; v2(2000,2735) 2000,2684.46 1990.24,2674.69 1990.24,2672.76 ; Q6.1 2016,2280.32 1990.24,2306.08 1990.24,2672.76
  Bottom Layer w10: v1(1784,3181) 1784.8,3181.8 U1.18 ; v1(1926,3125) 2000,3051 v2(2000,2735)
WP: U1.17 U4.3 | length 397.6
  Top Layer w10: U4.3 1761.92,2948.92 v2(1761.92,3041)
  Bottom Layer w10: v2(1761.92,3041) 1765.92,3045 1809.09,3045 1855,3090.91 1855,3138 1823,3170 1823,3200 1810.39,3212.61 U1.17
pads on no net: H1.H H2.H H3.H H4.H U1.3 U2.4 U3.4 U4.4

## Polygon pours and split planes (outlines as drawn)
5V on Top Layer "Top Layer-5V" (solid, pour order 34): 1518,2878 1518,2931 1510,2939 1510,3124 1530,3144 1591,3144 1605,3158 1605,3192 1582,3215 1495,3215 1412,3132 1412,2945 1479,2878
5V on Top Layer "5V_L01_P032" (solid, pour order 32): 1979,3669 1979,3722 1955,3722 1869,3808 1869,3846 1924,3901 1974,3901 2060,3815 2060,3748 2044,3748 2037,3741 2018,3722 2018,3669
GND on Top Layer "GND_L01_P028" (solid, pour order 28): 1597,2878 1597,2949 1651,3003 1651,3024 1687,3060 1729.44,3060 1729.44,3103.56 1707,3126 1553,3126 1553,3022 1532,3001 1532,2972 1558,2946 1558,2878
GND on Top Layer "GND_L01_P022" (solid, pour order 22): 1806,2812 1806,2867 1780,2893 1735,2893 1735,2916 1839,2916 1875,2952 1875,3073.91 1916,3074 1916,2913 1845,2842 1845,2812
GND on Top Layer "GND_L01_P026" (solid, pour order 26): 2457,2814 2457,2869 2431,2895 2386,2895 2386,2918 2490,2918 2526,2954 2526,3075.91 2567,3076 2567,2915 2496,2844 2496,2814
GND on Top Layer "GND_L01_P024" (solid, pour order 24): 2131,2812 2131,2867 2105,2893 2060,2893 2060,2916 2164,2916 2200,2952 2200,3073.91 2241,3074 2241,2913 2170,2842 2170,2812
GND on Top Layer "GND-IN" (solid, pour order 18): 2603,4060 2603,3486 2928,3486 2928,3724 2784,3868 2784,4060
GND on Top Layer "5V-REG-GND" (solid, pour order 20): 2157.68,3509 2157,3509.68 2157,3721 2146,3721 2119,3748 2119.81,3748.81 2119.81,3827 2096.19,3827 2096.19,3743.88 2077.31,3725 2056,3725 2056,3667 2038,3649 2038,3509
VBATT+ on Top Layer "VBATT-IN" (solid, pour order 16): 2155,3748 2196,3707 2196,3506.77 2212.77,3490 2551,3490 2551,4060 2212.77,4060 2212.77,3802.23 2212,3803 2155,3803
VBATT+ on Top Layer "VBATT-FET-3" (solid, pour order 10): 2355.24,2667.08 2391.24,2703.08 2391.24,2796.08 2582.24,2796.08 2582.24,2699.08 2618.24,2663.08 2618.24,2652.08 2355.24,2652.08
VBATT+ on Top Layer "VBATT-FET-2" (solid, pour order 8): 2030.24,2667.08 2066.24,2703.08 2066.24,2796.08 2257.24,2796.08 2257.24,2699.08 2293.24,2663.08 2293.24,2652.08 2030.24,2652.08
VBATT+ on Top Layer "VBATT-FET-1" (solid, pour order 6): 1705.24,2667.08 1741.24,2703.08 1741.24,2796.08 1932.24,2796.08 1932.24,2699.08 1968.24,2663.08 1968.24,2652.08 1705.24,2652.08
FET_RET on Top Layer "FET-RET-TOP-3" (solid, pour order 4): 2518.24,2021.08 2392.24,2021.08 2392.24,2127.08 2467.24,2202.08 2518.24,2202.08
FET_RET on Top Layer "FET-RET-TOP-3" (solid, pour order 2): 2193.24,2021.08 2067.24,2021.08 2067.24,2127.08 2142.24,2202.08 2193.24,2202.08
FET_RET on Top Layer "FET-RET-TOP-1" (solid, pour order 0): 1868.24,2021.08 1742.24,2021.08 1742.24,2127.08 1817.24,2202.08 1868.24,2202.08
FET_RET on Bottom Layer "FET-RET-BOTTOM" (solid, pour order 14): 1801,1893 1802.23,1973.77 1792,1984 1733,2043 1733,2128 1816,2211 2509.31,2211 2528,2192.31 2528,2068 2457,1997 1965,1997 1863,1895 1863,1827 1800.54,1827 1800,1827.54
GND on Bottom Layer "RET-GND" (solid, pour order 12): 1745,1945.63 1730.88,1959.75 1730.88,1960 1617,1960 1617,1760 1745,1760
GND on Ground Plane (split plane): 3104.9,1320.1 1395.1,1320.1 1395.1,4104.9 3104.9,4104.9
no net on Ground Plane (split plane): 1938.9,2656.1 1736.39,2656.1 1736.39,2801.9 1938.9,2801.9
no net on Ground Plane (split plane): 2588.9,2656.1 2386.39,2656.1 2386.39,2801.9 2588.9,2801.9
no net on Ground Plane (split plane): 2263.9,2656.1 2061.39,2656.1 2061.39,2801.9 2263.9,2801.9
5V on Power Plane (split plane): 2137.9,3692.1 2006,3692.1 2004.05,3691.71 2002.4,3690.6 2001.59,3689.41 2000.4,3688.6 1923.4,3611.6 1922.29,3609.95 1921.9,3608 1921.9,3448.89 1499.4,3026.38 1498.29,3024.73 1497.9,3022.78 1497.9,2954 1498.29,2952.05 1499.4,2950.4 1564.4,2885.4 1566.05,2884.29 1568,2883.9 1701.9,2883.9 1701.9,2202.11 1657.4,2157.6 1656.29,2155.95 1655.9,2154 1655.9,2032.1 1395.1,2032.1 1395.1,4104.9 2137.9,4104.9
VBATT+ on Power Plane (split plane): 3104.9,1320.1 1395.1,1320.1 1395.1,2021.9 1661,2021.9 1662.95,2022.29 1664.6,2023.4 1665.71,2025.05 1666.1,2027 1666.1,2151.89 1710.6,2196.4 1711.71,2198.05 1712.1,2200 1712.1,2889 1711.71,2890.95 1710.6,2892.6 1708.95,2893.71 1707,2894.1 1570.11,2894.1 1508.1,2956.11 1508.1,3020.67 1930.6,3443.17 1931.71,3444.83 1932.1,3446.78 1932.1,3605.89 2007.6,3681.4 2007.94,3681.9 2143,3681.9 2144.95,3682.29 2146.6,3683.4 2147.71,3685.05 2148.1,3687 2148.1,4104.9 3104.9,4104.9

## Other copper
Ground Plane (plane layer: these items are gaps in the copper):
  lines w10: 1731.29,2651 1944,2651 1944,2807 1731.29,2807 1731.29,2651 ; 2056.29,2651 2269,2651 2269,2807 2056.29,2807 2056.29,2651 ; 2381.29,2651 2381.29,2807 2594,2807 2594,2651 2381.29,2651
Power Plane (plane layer: these items are gaps in the copper):
  lines w10: 1373,2889 1373,2595.5 1362,2584.5 1362,2331.5 1372,2321.5 1372,2027 1661,2027 1661,2154 1707,2200 1707,2889 1568,2889 1503,2954 1503,3022.78 1927,3446.78 1927,3608 2004,3685 ; 1375,3687 1375,4123 2143,4123 2143,3687 2006,3687

## Silkscreen, mask and mechanical layers (free items; w line width, h text height)
Top Overlay:
  text "-" at 2830.93,4023 h60
  text "+" at 2244.93,4014 h60
  text "5V" at 1937,3929 h60
  text "-" at 2632,3839 h60
  text "+" at 2444,3838 h60
  text "1" at 1926,3658 h60
  text "2" at 1926,3558 h60
  text "3" at 1926,3458 h60
  text "4" at 1926,3358 h60
  text "DUTY" at 2725,3329 h60
  text "Rev A" at 2102,3316 h100
  text "5" at 1926,3258 h60
  text "FG_OUT" at 2617,3234 h60
  text "UP" at 2294,3231 h40
  text "VP" at 1995,3209 h40
  text "GND" at 2793,3126 h60
  text "WP" at 1677,3124 h40
  text "AN. IN" at 2631,2994 h60
  text "GND" at 2781,2887 h60
  text "WN" at 1962,2780 h40
  text "VN" at 2289,2780 h40
  text "UN" at 2616,2780 h40
  text "ZERO-X" at 2712,2470 h60
  text "FDBK" at 2772.82,2378 h60
  text "Vaughn Kottler" at 1520,1738 h60 r90
  text "MCOM" at 3078,1547 h60 r90
  text "WVU" at 1732,1460 h60
Bottom Overlay:
  text "-" at 2632,3839 h60
  text "+" at 2444,3838 h60
  text "TB6575FNG" at 2889,3375 h60
  text "BLDC CTL" at 2848,3255 h60
  text "1: SEL_LAP (ON=0)" at 2631,2598 h60
  text "2: CW_CCW (ON=1)" at 2641,2505 h60
  text "3: LA (ON=1)" at 2642,2420 h60
  text "4: FMAX (ON=0)" at 2644,2338 h60
  text "OCP" at 1647,2325 h60
  text "Switches" at 2729,2315 h60 r270
  text "5: FST (ON=0)" at 2647,2254 h60
  text "M2 (x4)" at 3055,1639 h60
  text "W" at 2069,1573 h60
  text "V" at 2269,1573 h60
  text "U" at 2469,1573 h60
Board Outline:
  the board outline again, w10
Mechanical 15:
  lines w10: 1249,1352 1297,1304 ; 1251,1300 1349,1300 ; 1251,4077 1299,4125 ; 1251,4125 1349,4125 ; 1298,1304 1298,1440 ; 1299,1304 1347,1352 ; 1300,3989 1300,4125 ; 1301,4125 1349,4077 ; 1375,1176 1375,1274 ; 1376,1223 1376,1225 ; 1423,1176 1375,1224 1375,1226 ; 1423,1274 1375,1226 ; 1511,1225 1375,1225 1375,1226 ; 2987,1223 3123,1223 ; 3075,1174 3123,1222 ; 3075,1272 3123,1224 ; 3125,1176 3125,1274
  text "2825 mil. (71.755 mm)" at 1331,1485 h60 r90
  text "1750 mil. (44.45 mm)" at 1570,1192 h60